# Altium PCB PCB1.PcbDoc
Units mm, origin at the board's own origin, x right, y up, seen from the top; angles counter-clockwise.
Board outline 48.25 x 87.93 mm, 2 copper layers (Top Layer, Bottom Layer); 56 components, 42 nets, 197 pads, 86 vias.
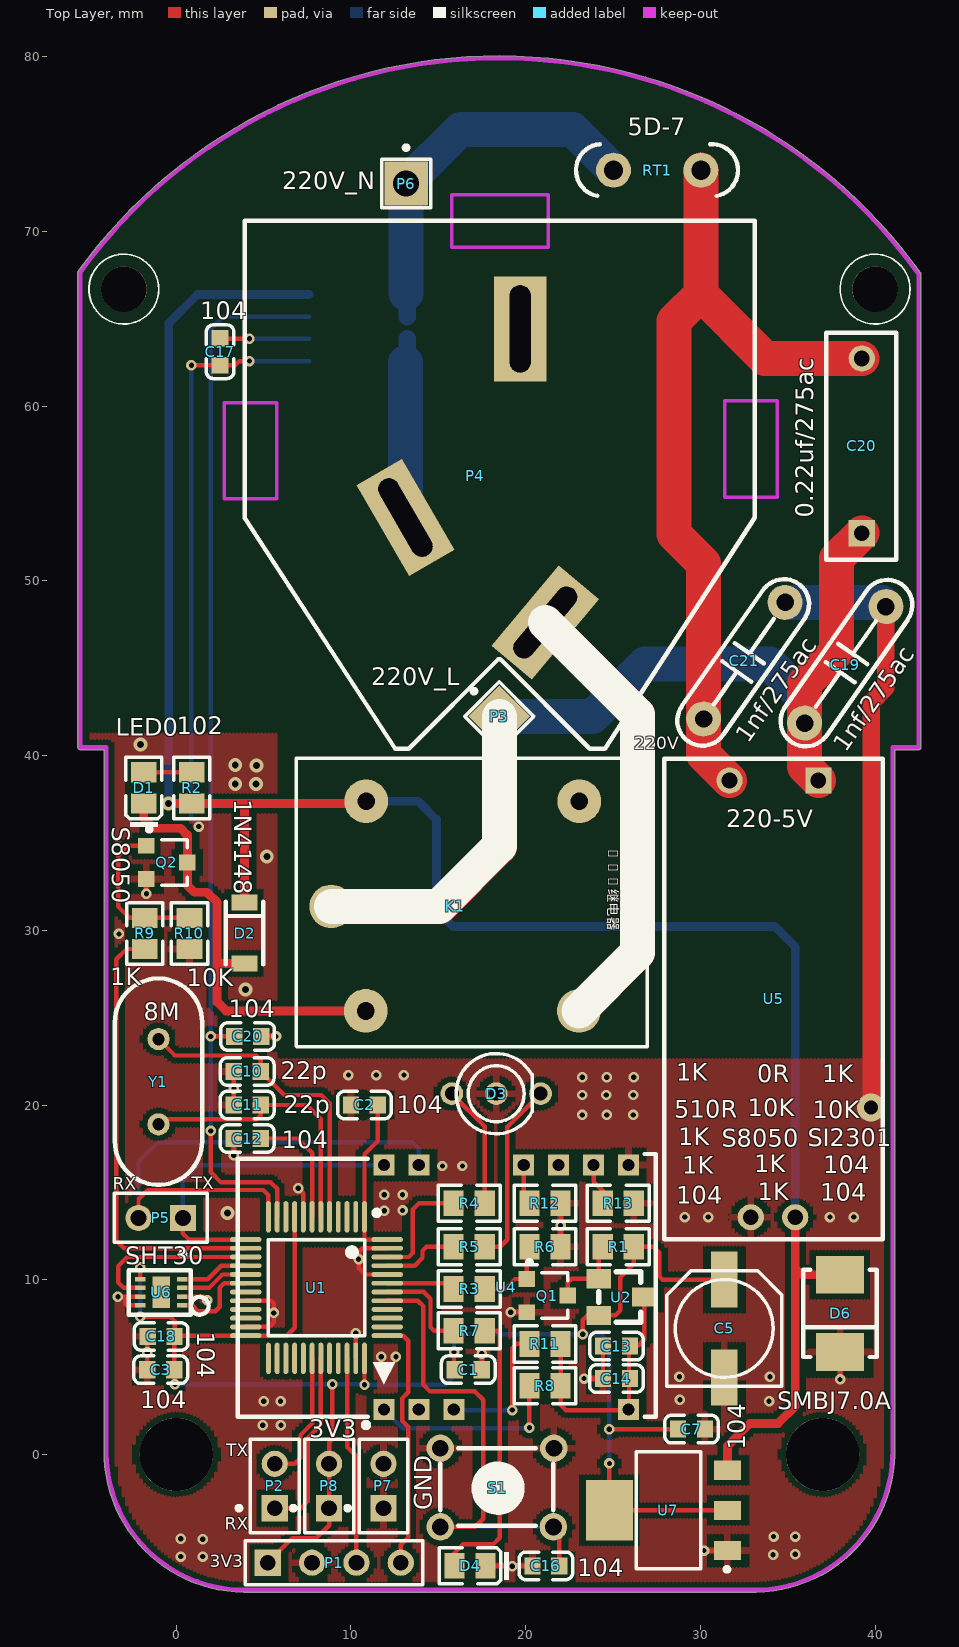
[diagram p0: Top Layer view]
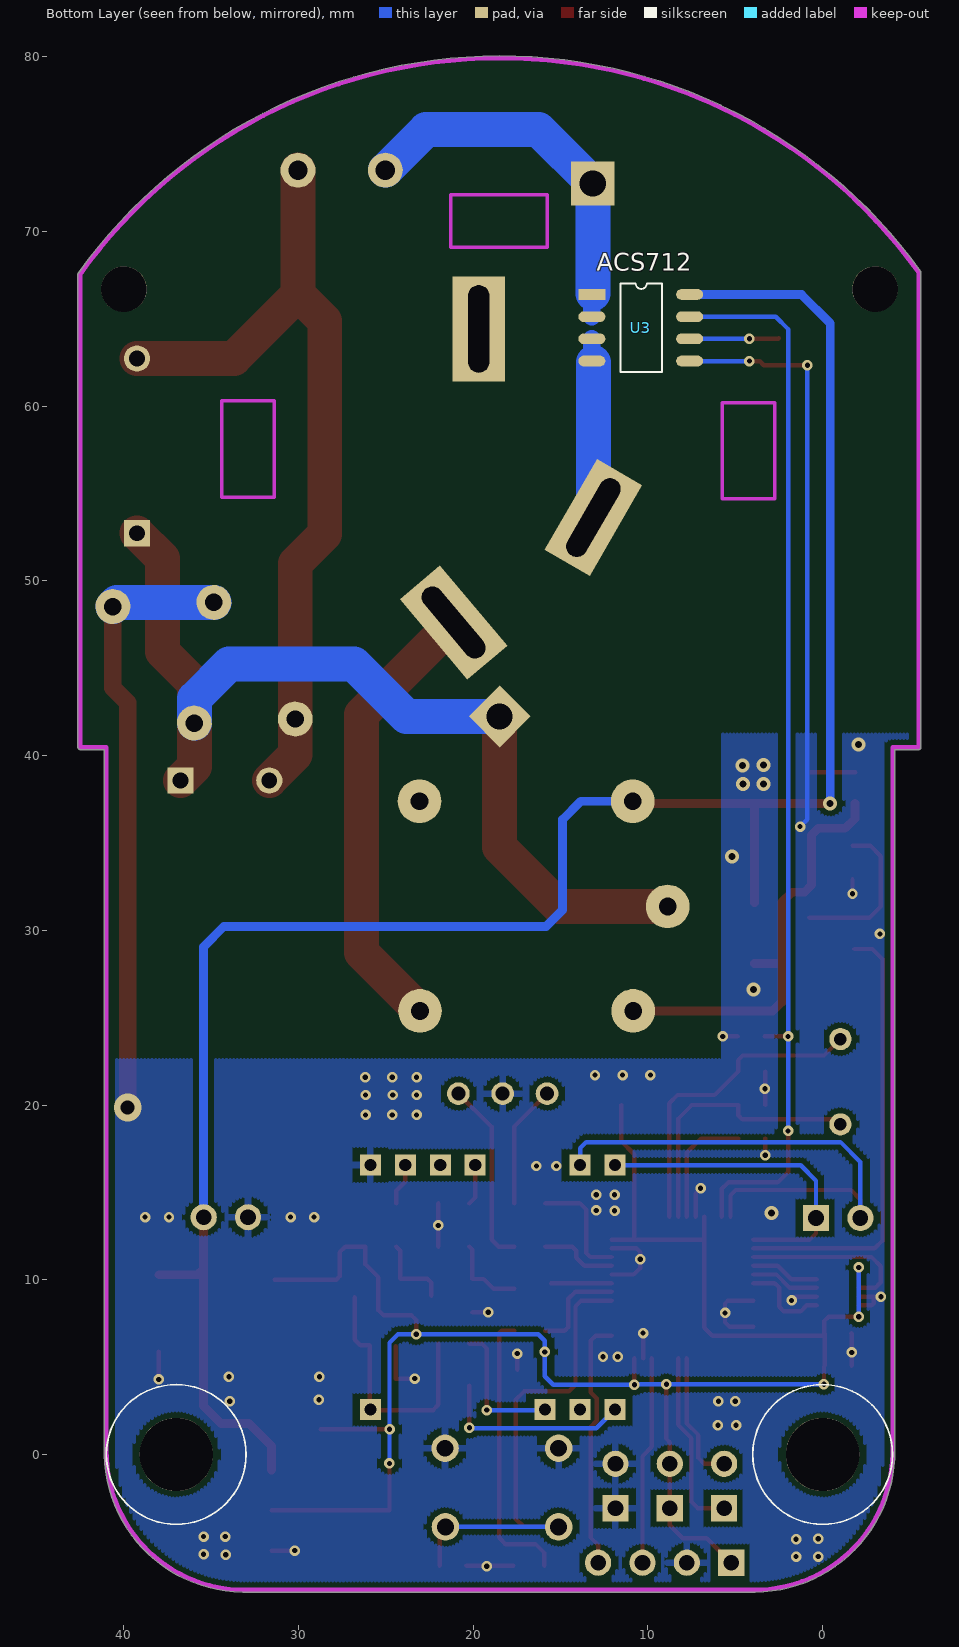
[diagram p1: Bottom Layer view, seen from below]
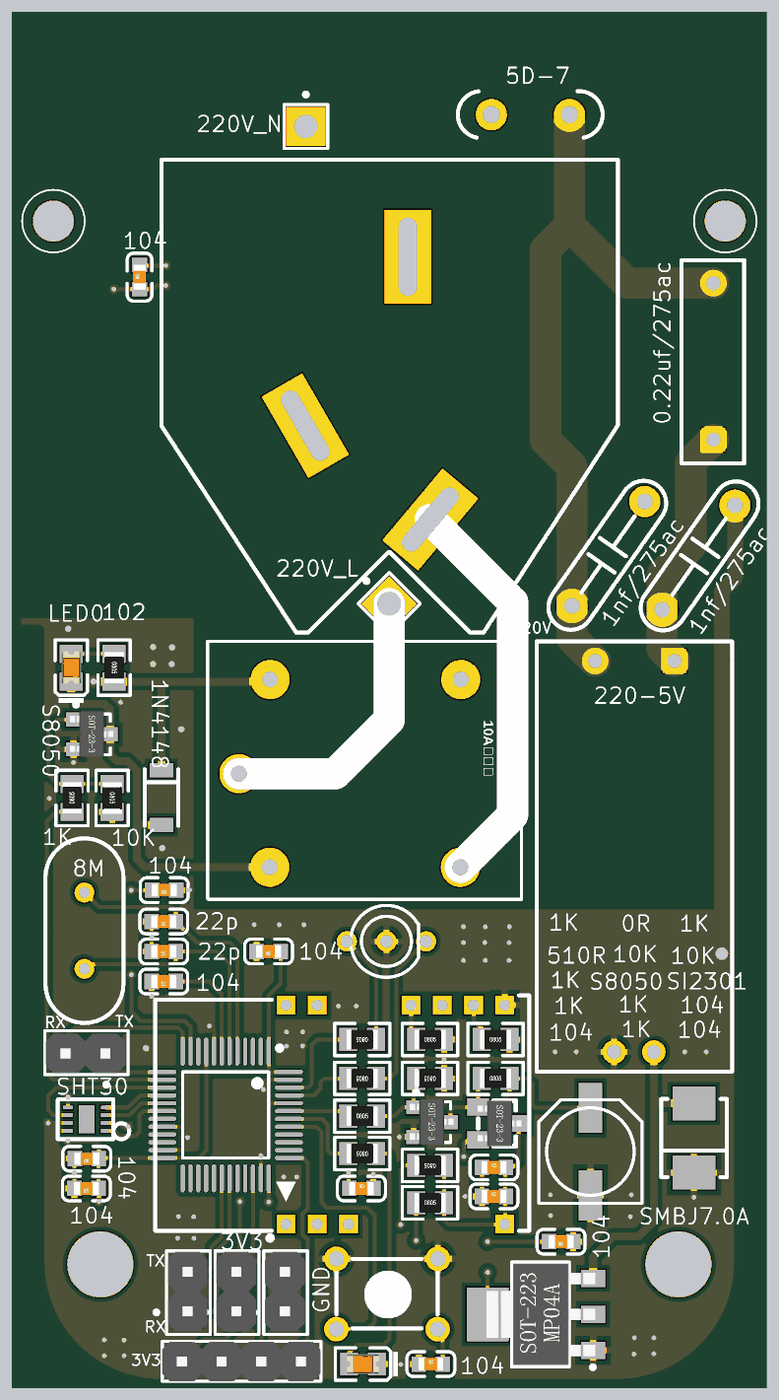
[diagram p2: 3D render of the assembled board from above, using the file's embedded part models]

## Layer stack, top to bottom
Top Solder: solder mask 0.0102, Solder Resist, Dk 3.5
Top Layer: signal copper 0.0356
Dielectric 1: dielectric 0.32, FR-4, Dk 4.8
Bottom Layer: signal copper 0.0356
Bottom Solder: solder mask 0.0102, Solder Resist, Dk 3.5

## Board outline
-4.127,0.031 cw(c3.898,0.152) -4.128,0.048 cw(c-4,0.05) -4.127,0.058 -4.127,40.348 -5.5,40.348 cw(c-5.5,40.475) -5.627,40.475 -5.627,67.647 cw(c-5.5,67.65) -5.603,67.724 cw(c18.461,50.394) 42.585,67.641 cw(c42.5,67.546) 42.627,67.546 42.627,40.475 cw(c42.5,40.475) 42.487,40.348 cw(c42.475,40.475) 42.475,40.348 41.127,40.348 41.127,0.025 cw(c41,0.025) 41.123,-0.007 cw(c33.098,0.148) 33.202,-7.878 cw(c33.2,-7.75) 33.2,-7.878 cw(c33.2,-7.75) 33.2,-7.878 3.898,-7.878 cw(c3.898,-7.75) 3.872,-7.875 cw(c3.898,0.152) -4.12,-0.215 cw(c-4,-0.172) -4.127,-0.172

## Design rules (kind name [scope] priority, off if disabled: settings)
Clearance Clearance_1 [All vs InPolygon] p1: gap=0.3
Clearance [All] p2: gap=0.152
HoleSize [All] p1: absolutevalues=TRUE maxlimit=10 minlimit=0.025 maxpercent=80.000 minpercent=20.000
MinimumSolderMaskSliver [All] p1: minsoldermaskwidth=0.025
PolygonConnect PolygonConnect_1 [All vs IsVia] p1: connectstyle=Direct reliefconductorwidth=0.254 reliefentries=4 polygonreliefangle="90 Angle" airgapwidth=0.254
PolygonConnect [All] p2: connectstyle=Relief reliefconductorwidth=0.381 reliefentries=4 polygonreliefangle="90 Angle" airgapwidth=0.381
RoutingVias [All] p1: holewidth=0.711 width=1.27 viastyle="Through Hole" minholewidth=0.711 minwidth=1.27 maxholewidth=0.711 maxwidth=1.27
SilkToSilkClearance [All] p1: silktosilkclearance=0.025
SilkToSolderMaskClearance [IsPad] p1: minsilkscreentomaskgap=0.025 clearancetoexposedcopper=TRUE
SolderMaskExpansion [All] p1: expansion=0.102
Width [All] p1: maxlimit=2 minlimit=0.152 preferedwidth=0.254
26 further rules are at their usual default settings.

## Components (designator, comment, footprint, x,y, rotation, side; value= is the part's Value field where it differs from the comment)
C1 "104" 0603_C 16.713,4.851 r0 top
C2 "104" 0603_C 10.77,20.002 r180 top
C3 "104" 0603_C -0.889,4.851 r180 top
C5 "220UF/6.3V" CC6.56.5 31.369,7.214 r270 top
C7 "104" 0603_C 29.489,1.448 r180 top
C10 "22p" 0603_C 4.061,21.92 r180 top
C11 "22p" 0603_C 4.061,20.002 r180 top
C12 "104" 0603_C 4.061,18.084 r180 top
C13 "104" 0603_C 25.197,6.198 r0 top
C14 "104" 0603_C 25.197,4.343 r0 top
C16 "104" 0603_C 21.158,-6.375 r0 top
C17 "104" 0603_C 2.512,63.119 r90 top
C18 "104" 0603_C -0.864,6.756 r180 top
C19 "1nf/275ac" C-RAD-7.5 35.964,41.859 r55 top
C20 "104" 0603_C 4.089,23.927 r180 top
C20 "0.22uf/275ac" 275VAC/0.22UF 37.211,51.206 r90 top
C21 "1nf/275ac" C-RAD-7.5 34.849,48.768 r235 top
D1 "LED0" 0805_LED_S1 -1.857,38.15 r90 top
D2 "1N4148" LL-34 3.912,29.845 r270 top
D3 "LED2-DIP_1" LED-A3 18.313,20.65 r180 top
D4 "LED0" 0805_LED_S1 16.815,-6.375 r180 top
D6 "SMBJ7.0A" SMB(DO-214AA)_S1 37.998,8.077 r90 top
K1 "10A继电器" SPDT-5 10.871,37.389 r0 top
P1 "Header 4" HDR2.54_4X1 5.232,-6.198 r0 top
P2 "COM_DEBUG" HDR2.54_2X1 5.639,-1.803 r90 top
P3 "220V_L" HDR1 18.491,42.24 r45 top
P4 "5孔插座" HDRFIVEHOLESOCHET 33.122,70.622 r180 top locked
P5 "升级ESP" HDR2.54_2X1 -0.889,13.538 r180 top
P6 "220V_N" HDR1 13.157,72.746 r0 top
P7 "GND" HDR2.54_2X1 11.862,-1.803 r90 top
P8 "3V3" HDR2.54_2X1 8.75,-1.803 r90 top
Q1 "S8050" SOT-23 21.234,9.093 r270 top
Q2 "S8050" SOT-23 -0.533,33.884 r270 top
R1 "10K" 0805_R 25.298,11.887 r0 top
R2 "102" 0805_R 0.886,38.15 r270 top
R3 "1K" 0805_R 16.764,9.474 r0 top
R4 "1K" 0805_R 16.764,14.376 r180 top
R5 "510R" 0805_R 16.764,11.887 r180 top
R6 "10K" 0805_R 21.107,11.887 r180 top
R7 "1K" 0805_R 16.764,7.087 r180 top
R8 "1K" 0805_R 21.107,3.937 r0 top
R9 "1K" 0805_R -1.806,29.82 r90 top
R10 "10K" 0805_R 0.759,29.82 r270 top
R11 "1K" 0805_R 21.107,6.325 r180 top
R12 "0R" 0805_R 21.107,14.376 r0 top
R13 "1K" 0805_R 25.298,14.376 r0 top
RT1 "5D-7" RES-DIP_5MM 27.531,73.507 r180 top
S1 "KEY_M" KEY_M 15.113,0.356 r0 top
U1 "STM32F103C8T6" LQFP-48_7x7x05P 8.026,9.55 r180 top
U2 "SI2301" SI2301 24.181,10.058 r180 top
U3 "ACS712" SOP-8 10.411,64.49 r180 bottom
U4 "ESP-12DIP" ESP_12DIP 11.887,2.565 r90 top
U5 "220-5V" 220V-5V 40.437,39.827 r270 top
U6 "SHT30" SHT30 0.33,10.033 r180 top
U7 "AMS1117-3.3" SOT-223 28.169,-3.2 r90 top
Y1 "8M" XTAL_US -1.016,23.774 r270 top

## Footprints (in the part's own frame and the unit in brackets; to place one, negate y for a bottom-side part, rotate by r counter-clockwise, add the part's x,y. Pads: shape width x height; smd on the part's side, far side on the other; paste and mask are expansions set on the pad)
220V-5V [mm] "插件 4脚"
  rect 1.5x1.5 hole 0.9: 1(1.25,-3.683)
  round 1.5 hole 0.9: 2(1.25,-8.763) 3(26.25,-5.007) 4(26.25,-7.547)
  silkscreen extent 0,-12.5 27.5,0
275VAC/0.22UF [mm] "插件 4脚"
  rect 1.5x1.5 hole 0.9: 1(1.524,-2.032)
  round 1.5 hole 0.9: 2(11.524,-2.032)
  silkscreen extent 0,-4 13,0
0603_C [mm]
  rect 0.93x0.98 smd: 1(-0.77,0) 2(0.77,0)
  silkscreen extent -1.53,-0.79 1.54,0.79, body extent -0.8,-0.4 0.8,0.4, height 0.3
0805_LED_S1 [mm]
  rect 1.16x1.47 smd: A(0.89,0) K(-0.89,0)
  silkscreen extent -2.24,-1.04 1.77,1.03, body extent -1.01,-0.62 1.01,0.62, height 1.1
0805_R [mm]
  rect 1.16x1.47 smd: 1(-0.89,0) 2(0.89,0)
  silkscreen extent -1.77,-1.04 1.77,1.03, body extent -1,-0.62 1,0.62, height 0.49
C-RAD-7.5 [mm] "插件 2脚 10mm间距 开关电源高压Y电容"
  round 2 hole 1: 1(0,0) 2(8.138,0.009)
  silkscreen extent -1.31,-1.44 9.69,1.44
CC6.56.5 [mm]
  rect 3.2x1.5 smd: 1(-2.794,0) 2(2.8,0)
  silkscreen extent -3.3,-3.3 3.3,3.3
ESP_12DIP [mm] "ESP-12 Wi-Fi Module by AI-Thinker"
  rect 1.2x1.2 hole 0.7: 1(0,0) 2(0,-2) 3(0,-4) 8(0,-14) 9(14,-14) 10(14,-12) 11(14,-10) 12(14,-8) 15(14,-2) 16(14,0)
  silkscreen extent -1.03,-15.57 14.63,8.37
HDR1 [mm] "插件 1脚"
  rect 2.5x2.5 hole 1.5: 1(0,0)
  silkscreen extent -1.4,-1.4 1.4,2.17
HDR2.54_2X1 [mm] "插件 2脚"
  rect 1.5x1.5 hole 0.9: 1(-1.27,0)
  round 1.5 hole 0.9: 2(1.27,0)
  silkscreen extent -2.67,-1.4 2.67,2.17, body extent -2.47,-1.22 2.61,1.32, height 8.54
HDR2.54_4X1 [mm] "插件 4脚"
  rect 1.5x1.5 hole 0.9: 1(0,0)
  round 1.5 hole 0.9: 2(2.54,0) 3(5.08,0) 4(7.62,0)
  silkscreen extent -1.27,-1.27 8.89,1.27, body extent -1.28,-1.29 8.88,1.25, height 8.54
HDRFIVEHOLESOCHET [mm] "五孔插座"
  rect 3x6 hole 5 slot 1.2 at 0 deg: 1(13.437,6.198)
  rect 3x6 hole 5 slot 1.2 at 140 deg rot 140: 2(12,23)
  rect 3x6 hole 5 slot 1.2 at 30 deg rot 30: 3(20,17)
  Keep-Out Layer lines w0.2: 30.381,15.922 30.381,10.414 27.381,10.414 27.381,15.922 30.381,15.922 ; 17.348,1.527 11.84,1.527 11.84,-1.473 17.348,-1.473 17.348,1.527 ; 1.73,15.82 -1.27,15.82 -1.27,10.312 1.73,10.312 1.73,15.82
  silkscreen extent 0,0 29.2,30.23
KEY_M [mil]
  round 62 hole 38: 1(0,0) 1(255.91,0) 2(0,-177.17) 2(255,-177.17)
  silkscreen extent 0,-175 255,0
LED-A3 [mm] "插件 3脚 双色LED"
  round 1.3 hole 0.8: 1(-2.54,0) 2(0,0) 3(2.54,0)
  silkscreen extent -2.06,-2.3 2.3,2.3
LL-34 [mm]
  rect 0.9x1.5 smd: 1(1.75,0) 2(-1.75,0)
  silkscreen extent -1.8,-1.08 1.8,1.08
LQFP-48_7x7x05P [mm]
  oval 0.28x1.8 smd mask+0.051: 1(-2.75,-4.05) 2(-2.25,-4.05) 3(-1.75,-4.05) 4(-1.25,-4.05) 5(-0.75,-4.05) 6(-0.25,-4.05) 7(0.25,-4.05) 8(0.75,-4.05) 9(1.25,-4.05) 10(1.75,-4.05) 11(2.25,-4.05) 12(2.75,-4.05) 25(2.75,4.05) 26(2.25,4.05) 27(1.75,4.05) 28(1.25,4.05) 29(0.75,4.05) 30(0.25,4.05) 31(-0.25,4.05) 32(-0.75,4.05) 33(-1.25,4.05) 34(-1.75,4.05) 35(-2.25,4.05) 36(-2.75,4.05)
  oval 1.8x0.28 smd mask+0.051: 13(4.05,-2.75) 14(4.05,-2.25) 15(4.05,-1.75) 16(4.05,-1.25) 17(4.05,-0.75) 18(4.05,-0.25) 19(4.05,0.25) 20(4.05,0.75) 21(4.05,1.25) 22(4.05,1.75) 23(4.05,2.25) 24(4.05,2.75) 37(-4.05,2.75) 38(-4.05,2.25) 39(-4.05,1.75) 40(-4.05,1.25) 41(-4.05,0.75) 42(-4.05,0.25) 43(-4.05,-0.25) 44(-4.05,-0.75) 45(-4.05,-1.25) 46(-4.05,-1.75) 47(-4.05,-2.25) 48(-4.05,-2.75)
  silkscreen extent -3.6,-4.42 2.75,2.75
RES-DIP_5MM [mm] "插件 2脚 电阻 间距5mm"
  round 2 hole 1.1: 1(-2.5,0) 2(2.5,0)
  silkscreen extent -4.62,-1.5 4.65,1.47
SHT30 [mm]
  rect 0.6x0.25 smd: 1(0,1.5) 2(0,1) 3(0,0.5) 4(0,0) 5(2.4,0) 6(2.4,0.5) 7(2.4,1) 8(2.4,1.5)
  rect 1x1.8 smd: 9(1.2,0.75)
  silkscreen extent -1.52,-0.51 3.05,2.03
SI2301 [mm] "贴片 3脚 PMOS开关管"
  rect 1.4x1.1 smd: 1(0,0) 2(0,2.1) 3(-2.6,1.05)
  silkscreen extent -2.41,-0.4 0,2.5, body extent -2.77,-0.4 0.03,2.5, height 1.2
SMB(DO-214AA)_S1 [mm]
  rect 2.159x2.743 smd: 1(2.21,0) 2(-2.21,0)
  silkscreen extent -2.5,-2.1 2.5,2.1
SOP-8 [mil] "贴片 8脚"
  rect 61x24 smd: 1(-110.24,75)
  oval 61x24 smd: 2(-110.24,25) 3(-110.24,-25) 4(-110.24,-75) 5(110.24,-75) 6(110.24,-25) 7(110.24,25) 8(110.24,75)
  silkscreen extent -46,-100 48,100, body extent -118,-99 120,99, height 63
SOT-23 [mm] "贴片 3脚"
  rect 0.9x0.95 smd: 1(-0.95,-1.175) 2(0.95,-1.175) 3(0,1.175)
  silkscreen extent -2.03,-1.14 1.3,1.18, body extent -1.48,-1.42 1.42,1.38, height 1.2
SOT-223 [mm] "贴片 3脚"
  rect 1.1x1.55 smd: 1(-2.3,-3.375) 2(0,-3.375) 3(2.3,-3.375)
  rect 3.45x2.7 smd: 2(0,3.375)
  silkscreen extent -3.5,-3.48 3.35,1.85, body extent -3.25,-3.5 3.25,3.46, height 1.7
SPDT-5 [mm] "插件 5脚 单刀单掷继电器DIP"
  round 2.5 hole 1.016: 1(0,0) 2(-0.025,-12) 3(-2,-6.02) 4(12.2,0) 5(12.175,-12)
  silkscreen extent -4,-14.05 16.09,2.45
XTAL_US [mil]
  round 50 hole 28: 1(0,0) 2(192.13,0)
  silkscreen extent -137,-98 329,98

## Part data
C1 C2 C3 C10 C11 C12 C19 C20 C21: library part Cap, "Capacitor"
C5: library part CAP-POL, "极性电容SMD"
C7 C13 C14 C16 C17 C20: library part CAP, "无极电容SMD"
C18: library part CAP, "Capacitor"
D1 D4: "Typical INFRARED GaAs LED"
D2: library part DIODE-SMD, "二极管SMD"
D3: "共阴双色LED"
D6: library part "Diode 18TQ045", "Schottky Rectifier"
K1: library part Relay-SPDT-2, "单杆单掷继电器普通用"
P1: "Header, 4-Pin"
P2 P5 P7 P8: library part "Header 2X1", "单排针"
P3 P6: library part "Header 1X1", "单排针"
P4: library part "Header 3X1", "单排针"
Q1 Q2: library part 2N8050, "NPN三极管"
R1 R3 R4 R5 R6 R7 R8 R9 R10 R11 R12 R13: library part RES, "电阻SMD"
R2: library part R_2
RT1: library part "Res Thermal", "Thermistor"
U1: library part stm32f103v8t6
U2: "PMOS开关管"
U3: "ACS712电流检测IC"
U5: library part AD-DC
U7: library part AMS1117
Y1: library part XTAL, "Crystal Oscillator"

## Free pads (board coordinates)
  round 4.2 hole 4.2: 0(0,0) 0(37,0)
  round 2.6 hole 2.6: 1(-3,66.7) 1(40,66.7)

## Via types
v1: diameter 0.6, hole 0.3, Top Layer to Bottom Layer, tented both sides, 76 vias
v2: diameter 0.8, hole 0.4, Top Layer to Bottom Layer, tented both sides, 9 vias
v3: diameter 1.6, hole 0.8, Top Layer to Bottom Layer, tented both sides, 1 vias

## Nets (pads, with @x,y where several pads share a name; then routed paths per layer and width w, separated by ;. In a path a pad name is that pad's centre, name@x,y a point inside that pad or via, vN(x,y) a via of type N, cw(c..) or ccw(c..) an arc to the next point about the centre after c; other vN are vias at no path point)
2LED_G: R4.2 U1.46 | length 6.5
  Top Layer w0.254: U1.46 13.307,11.3 13.538,11.532 13.538,14.021 13.894,14.376 R4.2
2LED_R: R5.2 U1.45 | length 4.5
  Top Layer w0.254: U1.45 13.645,10.8 14.097,11.252 14.097,11.659 14.326,11.887 R5.2
3V3: C1.1 C2.1 C3.1 C5.1 C7.2 C18.1 P1.1 P8.1 P8.2 R1.2 U1.1 U1.9 U1.24 U1.36 U1.48 U2.2 U6.5 U7.2 | length 112.7
  Top Layer w0.254: v1(-2.07,7.887) -0.343,7.887 -0.094,7.637 C18.1@-0.094,6.934 ; U6.5 v1(-2.07,10.706) ; v1(-0.076,4.013) -0.076,5.037 -0.119,5.08 -0.119,6.909 C18.1@-0.094,6.934 ; P1.1 6.629,-4.801 8.001,-4.801 8.75,-4.051 P8.1 P8.2 8.75,0.699 8.941,0.889 v1(8.941,4.013) ; U1.9 6.776,7.259 6.318,6.8 U1.24 0.04,6.8 C18.1@-0.094,6.934 ; 6.783,12.3 U1.48 ; v1(10.776,3.995) U1.36 ; 10.776,12.319 U1.1 10.776,17.177 11.54,17.94 C2.1 ; v1(15.9,5.867) 15.9,4.894 C1.1 ; v1(23.266,6.883) 23.266,7.696 23.529,7.958 U2.2 25.129,7.958 25.425,8.255 25.425,10.135 26.188,10.898 R1.2 27.33,11.887 27.635,11.582 27.635,10.211 27.838,10.008 C5.1 ; v1(24.79,1.448) C7.2 ; v1(24.794,-0.511) 24.794,-3.2 U7.2@31.544,-3.2
  Bottom Layer w0.254: v1(-2.07,7.887) v1(-2.07,10.706) ; v1(-0.076,4.013) v1(8.941,4.013) 10.758,4.013 v1(10.776,3.995) 15.425,3.995 15.9,4.47 v1(15.9,5.867) 15.9,6.502 16.281,6.883 v1(23.266,6.883) 24.308,6.883 24.794,6.398 v1(24.794,-0.511)
5V: D2.2 D6.1 K1.1 R2.2 U3.8 U5.3 U7.3 | length 119.5
  Top Layer w0.508: v2(-0.432,37.262) 0.885,37.262 R2.2 10.743,37.26 K1.1 ; D2.2 3.912,37.235 ; U7.3 31.544,0.479 32.842,1.778 34.442,1.778 35.43,2.765 35.43,10.643 ; U5.3 35.43,10.643 ; D6.1 35.785,10.287 35.43,10.643
  Bottom Layer w0.508: v2(-0.432,37.262) -0.432,64.745 1.219,66.395 U3.8 ; K1.1 13.843,37.389 14.888,36.344 14.888,31.166 15.827,30.226 34.265,30.226 35.43,29.061 U5.3
220V_L: C19.1 C20.1@39.243,52.73 K1.3 P3.1 U5.1 | length 55.3
  Top Layer w2: K1.3 15.088,31.369 18.491,34.773 P3.1 ; U5.1 35.964,39.367 C19.1 35.964,44.117 37.795,45.949 37.795,51.283 C20.1@39.243,52.73
  Bottom Layer w2: P3.1 23.825,42.24 26.822,45.237 33.985,45.237 35.964,43.259 C19.1
220V_N: P6.1 RT1.2 U3.1 U3.2 | length 21.7
  Bottom Layer w1: U3.2 U3.1
  Bottom Layer w2: U3.1@13.157,66.449 P6.1 16.256,75.844 22.694,75.844 RT1.2
ACS712_ADC: C20.2@3.319,23.927 U1.11 U3.7 | length 61.3
  Top Layer w0.254: v1(1.981,18.517) 1.981,16.154 2.565,15.57 5.41,15.57 5.776,15.204 U1.11 ; v1(1.981,23.927) C20.2@3.319,23.927
  Bottom Layer w0.254: v1(1.981,18.517) v1(1.981,23.927) 1.981,64.414 2.692,65.125 U3.7
ALERT: U1.17 U6.3 | length 4
  Top Layer w0.254: U6.3 1.878,9.533 2.646,10.3 U1.17
DEBUG_RX: P2.1 U1.31 | length 10.5
  Top Layer w0.254: P2.1 7.137,-3.073 7.518,-2.692 7.518,0.94 8.276,1.698 U1.31
DEBUG_TX: P2.2 U1.30 | length 7.6
  Top Layer w0.254: P2.2 6.782,-0.533 7.112,-0.203 7.112,1.108 7.776,1.773 U1.30
ESP_ONOFF: R3.1 U1.43 | length 3.5
  Top Layer w0.254: U1.43 R3.1@15.548,9.8
ESP_RX: P5.2 U1.12 U4.15 | length 30.9
  Top Layer w0.254: P5.2 -2.159,14.605 -1.626,15.138 4.978,15.138 5.276,14.84 U1.12
  Bottom Layer w0.254: P5.2 -2.159,16.739 -1.016,17.882 13.538,17.882 13.887,17.533 U4.15
ESP_TX: P5.1 U1.13 U4.16 | length 19.1
  Top Layer w0.254: P5.1 0.381,12.649 0.73,12.3 U1.13
  Bottom Layer w0.254: P5.1 0.381,15.672 1.26,16.551 11.887,16.551 U4.16 ; U4.16@11.887,16.54 U4.16@12.319,16.54
GND: C1.2 C2.2 C3.2 C5.2 C7.1 C10.2 C11.2 C12.2 C13.1 C14.1 C16.1 C17.1 C18.2 C19.2 C20.1@4.859,23.927 C21.1 D3.2 D4.K D6.2 P1.2 P7.1 P7.2 Q1.2 Q2.2 R6.1 R10.2 R12.2 R13.2 S1.1 U1.8 U1.20 U1.23 U1.35 U1.44 U1.47 U3.5 U4.9 U5.4 U6.2 U6.7 U6.8 U7.1 | length 103.8
  Top Layer w0.254: v1(-3.337,9.033) -2.921,9.033 ; U6.8 -2.818,8.533 -2.921,8.636 -2.921,9.033 ; U6.7 -2.921,9.033 ; v1(-1.708,32.087) Q2.2 ; C3.2@-1.659,5.08 -1.659,6.909 C18.2@-1.634,6.934 ; U6.2 1.559,9.033 v1(1.778,8.814) ; v1(0.872,62.349) C17.1 3.37,62.349 3.606,62.585 v1(4.191,62.585) ; v1(3.291,17.13) C12.2 ; C11.2 C10.2 ; U1.23 5.319,7.3 5.588,7.569 5.588,8.636 5.424,8.8 U1.20 ; C20.1@4.859,23.927 v1(5.715,23.927) ; v1(6.985,15.24) 7.276,14.949 U1.8 ; U1.35 v1(10.276,6.949) ; U1.44 10.807,10.3 10.439,10.668 10.439,11.582 10.657,11.8 U1.47 ; C1.2 v1(17.483,5.774) ; D4.K C16.1 ; v1(19.141,8.143) Q1.2 ; R6.1 R12.2 ; v1(23.343,4.343) C14.1 C13.1 ; v1(30.212,-5.5) U7.1 ; v1(37.998,4.293) D6.2
  Top Layer w1: v3(39.776,19.863) 39.776,43.028 40.624,43.876 C19.2
  Bottom Layer w0.254: v1(0.872,62.349) 0.872,36.364 v1(1.295,35.941) ; v1(4.191,62.585) U3.5
  Bottom Layer w2: C21.1 40.386,48.768 C19.2
  other v1: 19.228,-6.401 0.254,-5.842 1.524,-5.842 34.163,-5.74 35.433,-5.715 1.524,-4.851 0.254,-4.826 34.188,-4.699 35.433,-4.699 4.953,1.676 5.994,1.676 5.004,3.048 5.969,3.048 33.934,3.048 28.829,3.124 28.804,4.445 33.985,4.445 11.735,5.588 12.573,5.588 -1.659,5.842 5.588,8.103 10.439,11.176 21.997,13.106 29.108,13.589 30.455,13.589 37.414,13.589 38.786,13.589 11.913,13.945 12.954,13.97 11.913,14.859 12.954,14.859 15.24,16.51 16.383,16.51 23.241,19.431 24.638,19.431 26.162,19.431 23.241,20.574 24.613,20.574 26.162,20.574 3.302,20.93 23.241,21.59 24.638,21.59 26.187,21.59 9.855,21.717 11.455,21.717 13.03,21.717 -3.277,29.794
  other v2: 2.921,13.818 3.962,26.619 5.182,34.214 3.378,38.379 4.572,38.379 4.597,39.446 3.378,39.472 -2.057,40.64
JTCK: P1.4 U1.37 | length 14.5
  Top Layer w0.254: U1.37 12.986,6.8 13.284,6.502 13.284,3.558 12.929,3.202 12.929,1.929 13.284,1.573 13.284,-4.75 12.852,-5.182 P1.4
JTMS: P1.3 U1.34 | length 11.9
  Top Layer w0.254: U1.34 9.776,0.434 10.312,-0.102 P1.3
KEY2: C16.2 S1.2 U1.41 | length 28.8
  Top Layer w0.254: U1.41 13.831,8.8 14.148,8.484 14.148,3.988 14.529,3.607 17.094,3.607 17.577,3.124 17.577,-3.683 17.115,-4.144 S1.2@15.113,-4.144 ; S1.2@21.59,-4.144 21.928,-4.483 C16.2
  Bottom Layer w0.254: S1.2@15.113,-4.144 S1.2@21.59,-4.144
KEY2LED: R7.2 U1.42 | length 5.7
  Top Layer w0.254: U1.42 14.169,9.3 14.554,8.915 14.554,7.29 14.757,7.087 R7.2
NetC10_1: C10.1 U1.5 Y1.1 | length 18.2
  Top Layer w0.254: Y1.1 -0.076,22.835 4.572,22.835 4.831,22.575 C10.1 6.177,20.574 8.306,20.574 8.776,20.103 U1.5
NetC11_1: C11.1 U1.6 Y1.2 | length 16
  Top Layer w0.254: Y1.2 -0.733,19.177 4.597,19.177 4.831,19.411 C11.1 7.481,20.002 8.276,19.206 U1.6
NetC12_1: C12.1 U1.7 | length 7
  Top Layer w0.254: C12.1 6.96,18.084 7.776,17.268 U1.7
NetC13_2: C13.2 C14.2 R8.2 R11.1 U2.3 U4.8 | length 15.2
  Top Layer w0.254: R11.1 R8.2 21.997,2.844 22.301,2.54 26.319,2.54 25.916,2.943 25.916,4.445 25.916,6.248 26.467,6.248 26.781,6.562 U2.3
NetC17_2: C17.2 U3.6 | length 5.1
  Top Layer w0.254: C17.2 2.545,63.855 v1(4.191,63.855)
  Bottom Layer w0.254: v1(4.191,63.855) U3.6
NetC20_2: C20.2@39.243,62.73 C21.2 RT1.1 U5.2 | length 47.6
  Top Layer w2: RT1.1 30.031,66.404 ; U5.2 30.188,40.063 C21.2 30.188,50.99 28.499,52.68 28.499,64.872 30.031,66.404 ; C20.2@39.243,62.73 33.704,62.73 30.031,66.404
NetD1_A: D1.A R2.1 | length 2.7
  Top Layer w0.254: D1.A R2.1
NetD1_K: D1.K D2.1 K1.2 Q2.3 | length 24.7
  Top Layer w0.508: D1.K -1.857,36.401 -1.295,35.839 0.254,35.839 0.642,35.452 Q2.3 0.642,32.582 1.041,32.182 1.753,32.182 2.337,31.598 2.337,25.908 2.856,25.389 K1.2 ; 2.339,28.095 D2.1
NetD3_1: D3.1 R5.1 | length 10.6
  Top Layer w0.254: R5.1 18.542,11.887 18.948,12.294 18.948,18.745 D3.1
NetD3_3: D3.3 R4.1 | length 7.1
  Top Layer w0.254: D3.3 17.654,18.77 R4.1
NetD4_A: D4.A R7.1 | length 16.3
  Top Layer w0.254: D4.A 15.925,-5.64 16.434,-5.131 18.161,-5.131 18.517,-4.775 18.517,6.934 18.364,7.087 R7.1
NetK1_5: K1.5 P4.2 | length 25.8
  Top Layer w2: P4.2 26.391,42.353 26.391,28.734 K1.5
NetP4_3: P4.3 U3.3 U3.4 | length 10.1
  Bottom Layer w1: U3.4 U3.3
  Bottom Layer w2: P4.3 U3.4@13.122,62.496
NetQ1_1: Q1.1 R3.2 R6.2 | length 4.6
  Top Layer w0.254: R3.2 18.821,9.474 19.39,10.043 Q1.1 20.059,11.729 R6.2
NetQ1_3: Q1.3 R1.1 U2.1 | length 4.5
  Top Layer w0.254: Q1.3 22.409,9.836 22.631,10.058 U2.1 24.181,11.66 R1.1
NetQ2_1: Q2.1 R9.2 R10.1 | length 9.1
  Top Layer w0.254: Q2.1 -2.733,34.834 -3.327,34.239 -3.327,31.369 -2.669,30.71 R9.2 R10.1
NetR8_1: R8.1 U4.1 | length 11.2
  Top Layer w0.254: R8.1 R8.1 v1(20.218,1.524)
  Bottom Layer w0.254: U4.1 12.954,1.499 20.193,1.499 v1(20.218,1.524)
NetR11_2: R11.2 U4.3 | length 8
  Top Layer w0.254: v1(19.228,2.54) 19.228,6.071 19.482,6.325 R11.2
  Bottom Layer w0.254: U4.3 15.913,2.54 v1(19.228,2.54)
NetR12_1: R12.1 U4.12 | length 2.3
  Top Layer w0.254: U4.12 19.887,14.707 R12.1
NetR13_1: R13.1 U4.10 | length 2.4
  Top Layer w0.254: U4.10 23.887,15.61 24.408,15.089 R13.1
RELAY_ONOFF: R9.1 U1.14 | length 25.6
  Top Layer w0.254: R9.1 -2.845,28.93 -3.429,28.346 -3.429,12.243 -2.987,11.8 U1.14
RST: U1.15 U6.6 | length 9.8
  Top Layer w0.254: U6.6 -3.005,9.533 -3.327,9.855 -3.327,10.77 -2.797,11.3 U1.15
SCL: U1.16 U6.4 | length 4
  Top Layer w0.254: U6.4 1.803,10.033 2.571,10.8 U1.16
SDA: U1.18 U6.1 | length 5.1
  Top Layer w0.254: U6.1 0.916,8.533 1.245,8.204 2.235,8.204 2.489,8.458 2.489,9.55 2.739,9.8 U1.18
pads on no net: K1.4 P4.1 U1.2 U1.3 U1.4 U1.10 U1.19 U1.21 U1.22 U1.25 U1.26 U1.27 U1.28 U1.29 U1.32 U1.33 U1.38 U1.39 U1.40 U4.2 U4.11 U6.9

## Polygon pours and split planes (outlines as drawn)
GND on Top Layer "Top Layer-No Net" (hatched Vertical grid 0.203 track 0.203, remove dead copper, pour order 4): -5.537,41.224 5.842,41.224 5.867,41.199 5.867,22.606 5.893,22.581 41.046,22.581 41.046,-7.976 41.021,-8.001 -5.715,-8.001
GND on Bottom Layer "Top Layer-No Net" (hatched Vertical grid 0.203 track 0.203, remove dead copper, pour order 3): -5.537,41.224 5.842,41.224 5.867,41.199 5.867,22.606 5.893,22.581 41.046,22.581 41.046,-7.976 41.021,-8.001 -5.715,-8.001

## Keep-outs
Keep-Out Layer:
  lines w0.254: -4,0.05 ccw(c3.898,0.152) 4,-7.747 ; -4,-0.172 -4,40.475 -5.5,40.475 -5.5,67.65 cw(c18.461,50.394) 42.496,67.546 ; 3.898,-7.75 33.2,-7.75 ccw(c33.098,0.148) 40.997,0.25 ; 41,0.025 41,40.475 42.475,40.475 ; 42.5,40.475 42.5,67.546

## Silkscreen, mask and mechanical layers (free items; w line width, h text height)
Top Overlay:
  circle w0.1: c40,66.7 r2
  circle w0.1: c-3,66.7 r2
  lines w2: 8.871,31.369 15.037,31.369 18.491,34.823 18.491,42.24 ; 21.122,47.622 26.391,42.353 26.391,28.734 23.046,25.389
  text "220V" at 26.213,40.361 h0.7
  text "TX" at 0.889,15.189 h0.7
  text "RX" at -3.632,15.138 h0.7
  text "TX" at 2.87,-0.102 h0.7
  text "RX" at 2.769,-4.318 h0.7
  text "3V3" at 1.905,-6.452 h0.7
Bottom Overlay:
  circle w0.1: c0,0 r4
  circle w0.1: c37,0 r4
Bottom Solder:
  lines w2: 13.157,72.746 16.18,75.768 22.77,75.768 25.031,73.507

## Text inside footprints (layer, text, board x,y; h text height)
U4: Mechanical 13 "CUTOUT POLYGON" at 4.521,2.362 h0.25 r90; Mechanical 13 "ANTENNA AREA" at 4.013,2.362 h0.25 r90